# Altium PCB SFCMasterC.PcbDoc (part 1 of 2)
Units mm, origin at the board's own origin, x right, y up, seen from the top; angles counter-clockwise.
Board outline 152.4 x 101.6 mm, 2 copper layers (Top Layer, Bottom Layer); 178 components, 163 nets, 627 pads, 271 vias.
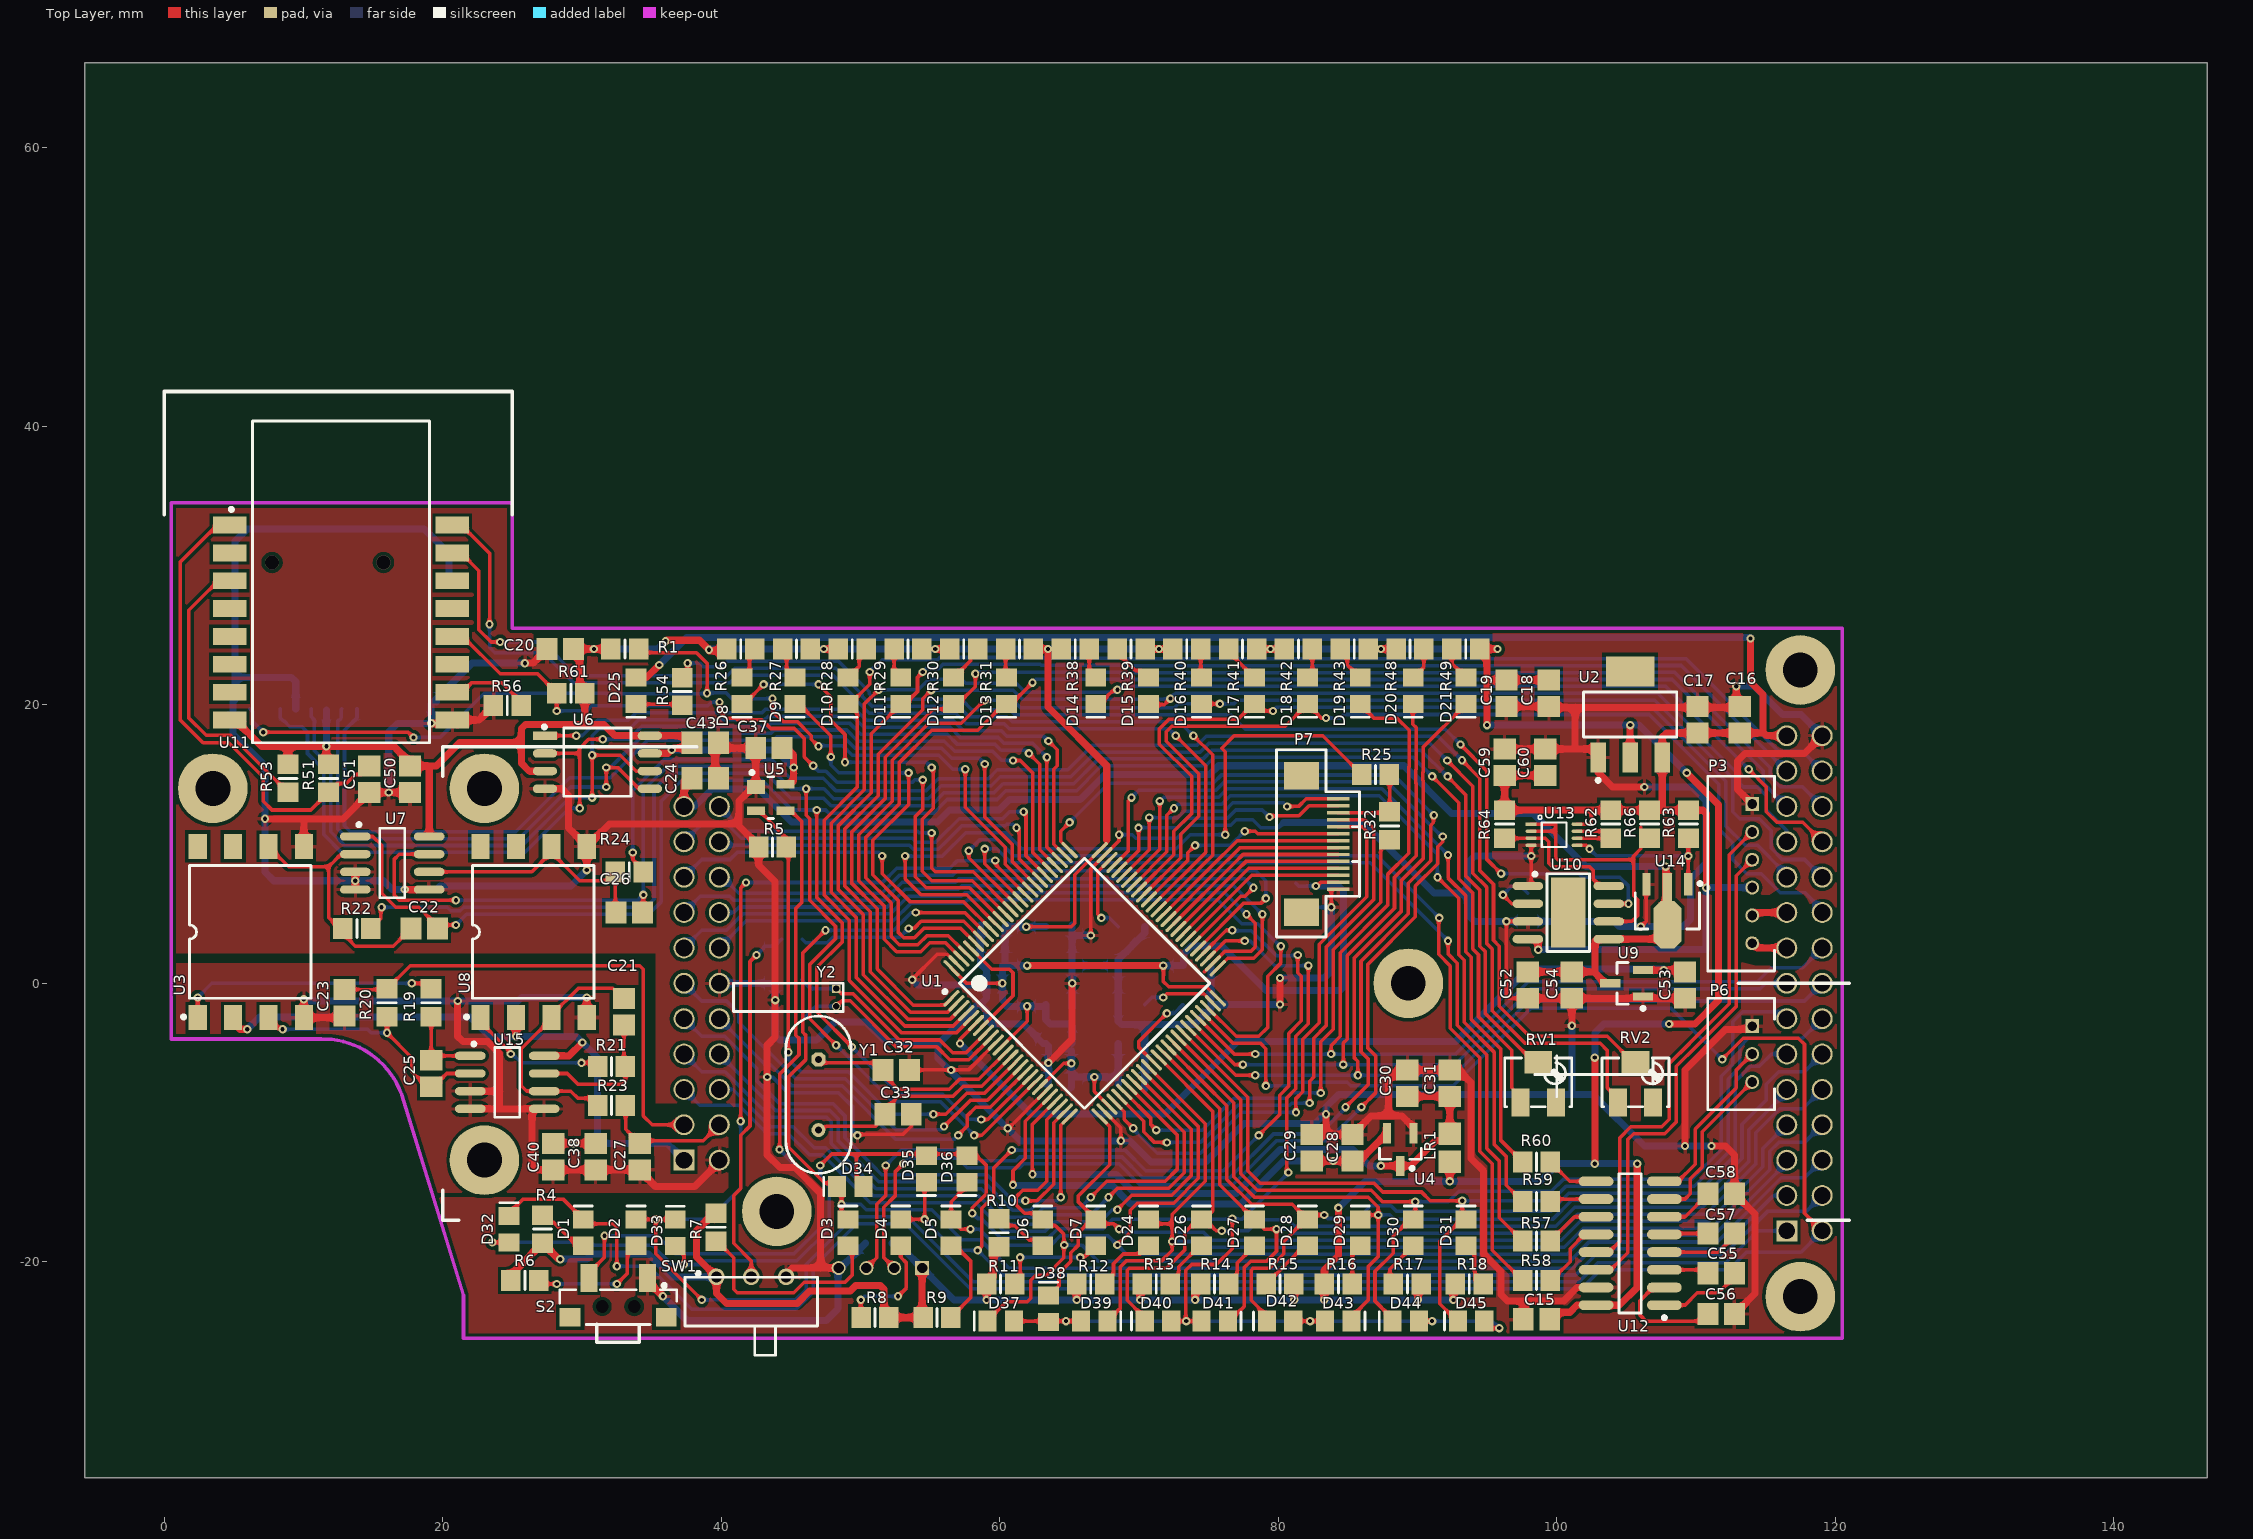
[diagram p0: Top Layer view]
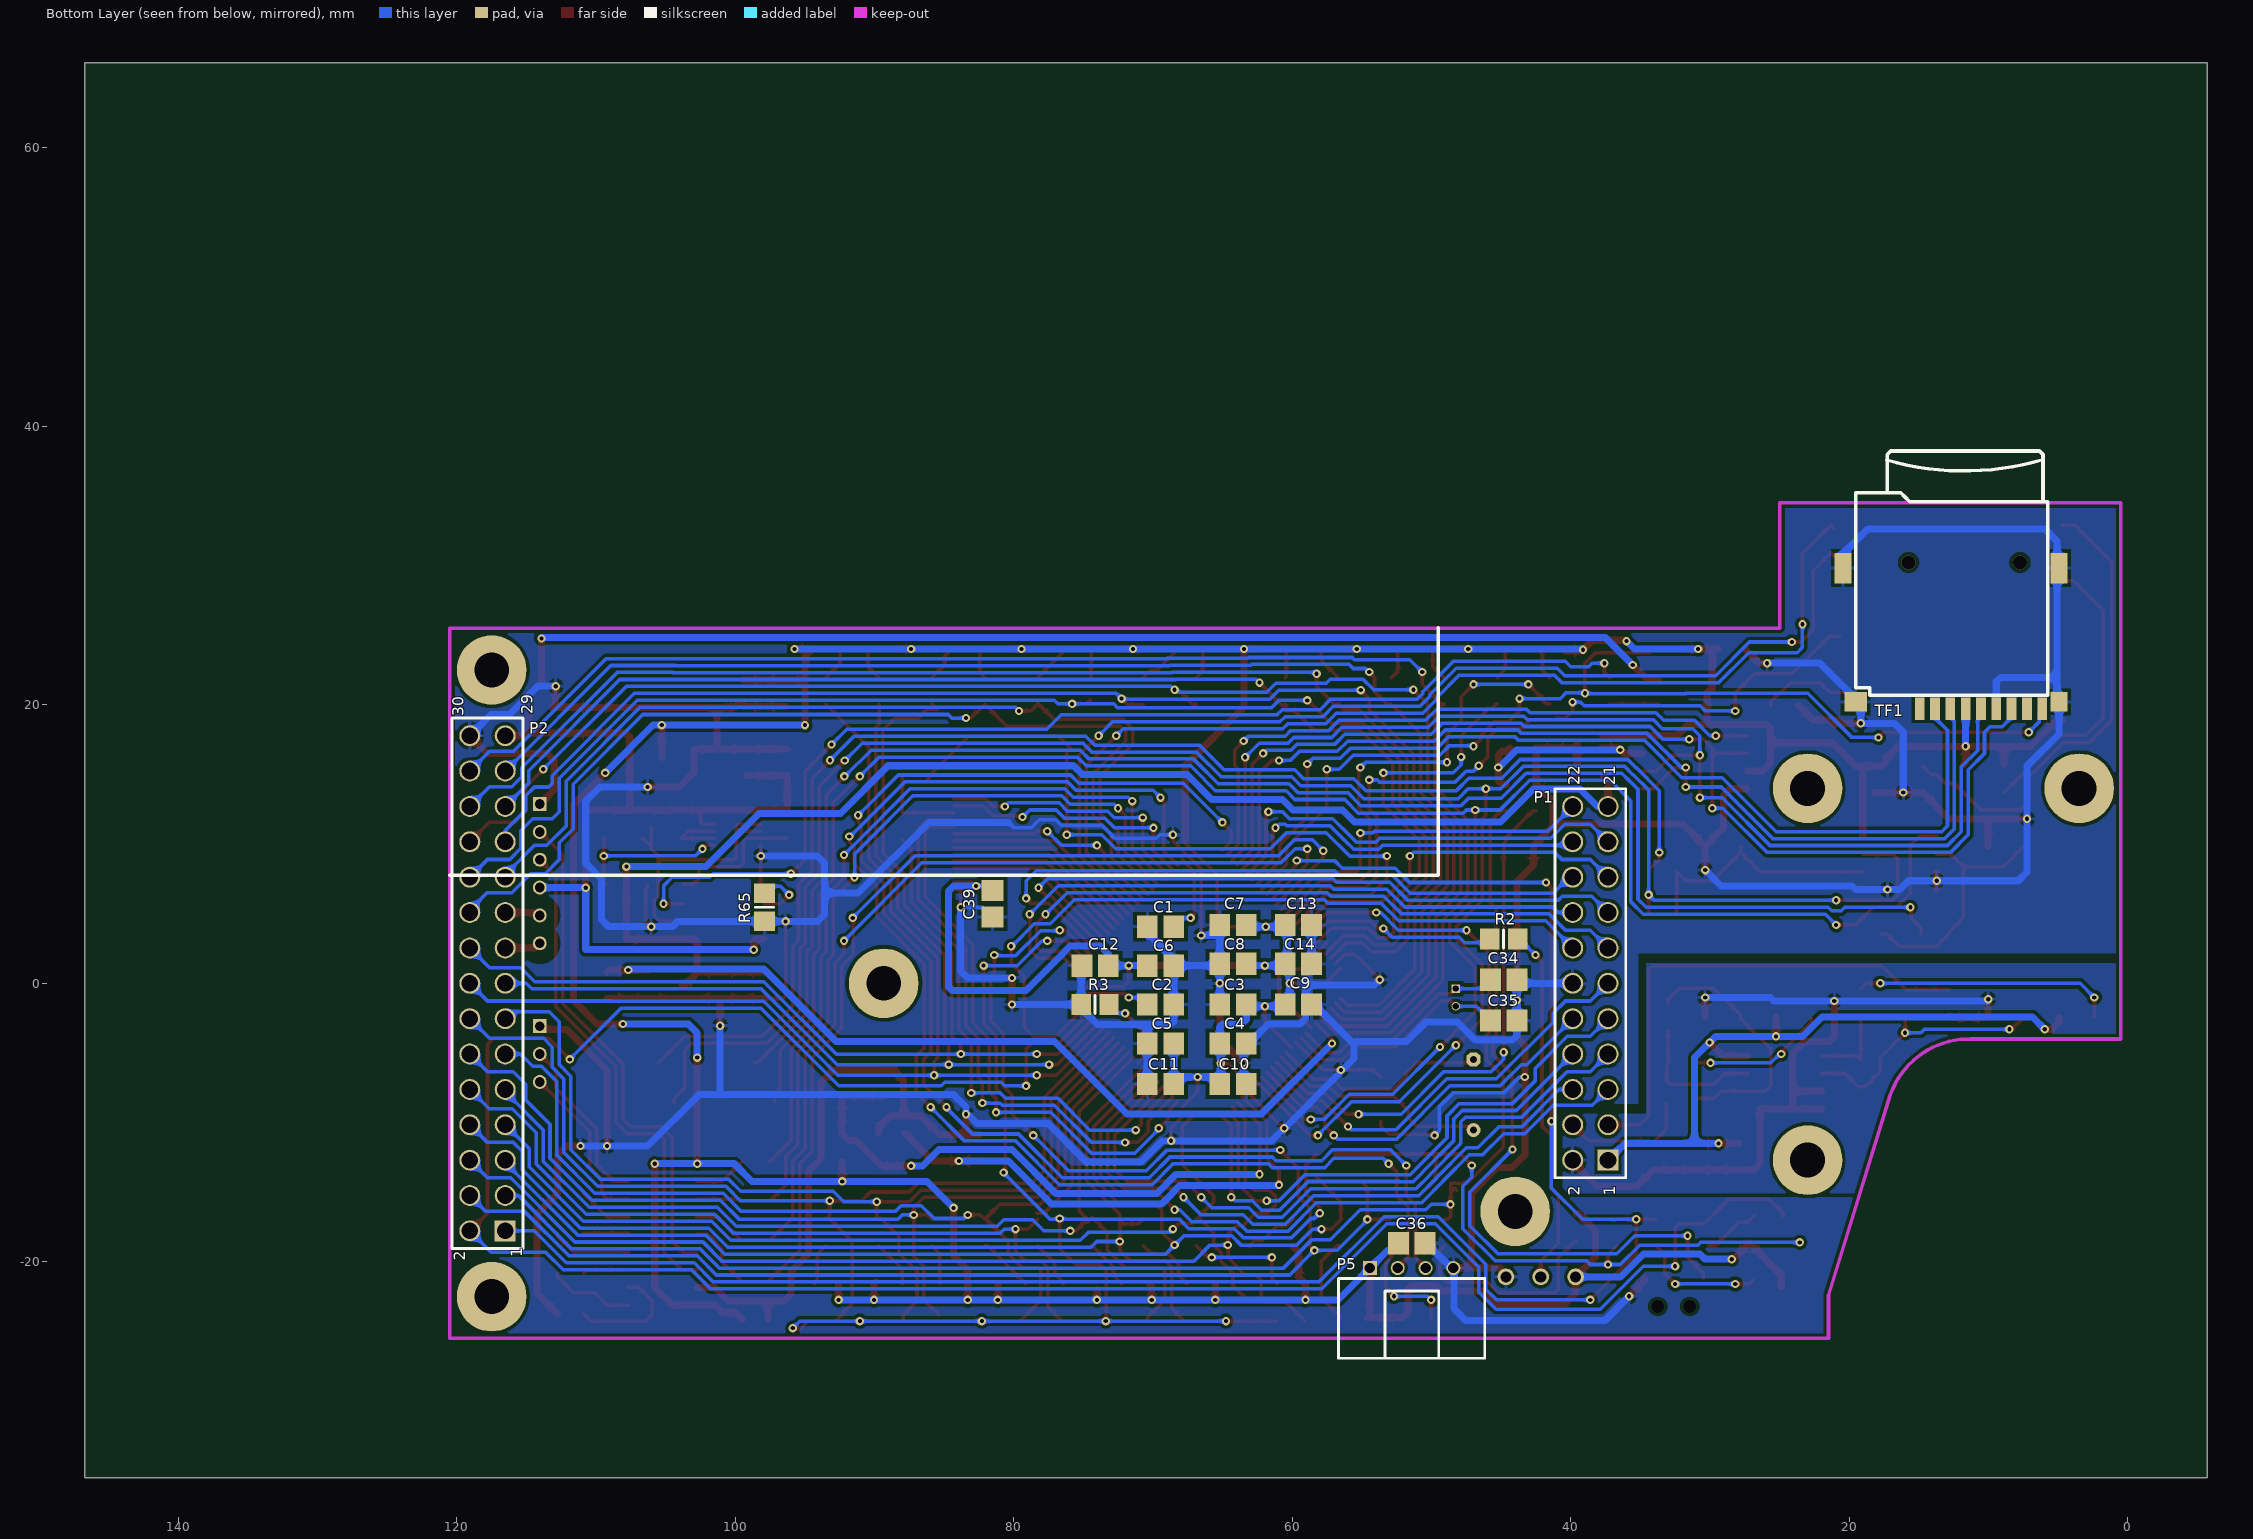
[diagram p1: Bottom Layer view, seen from below]

## Layer stack, top to bottom
Top Solder: solder mask 0.0102, Solder Resist, Dk 3.5
Top Layer: signal copper 0.0356
Dielectric 1: dielectric 0.32, FR-4, Dk 4.8
Bottom Layer: signal copper 0.0356
Bottom Solder: solder mask 0.0102, Solder Resist, Dk 3.5

## Board outline
-5.689,-35.504 146.711,-35.504 146.711,66.096 -5.689,66.096

## Design rules (kind name [scope] priority, off if disabled: settings)
Clearance Clearance_Poly-24VandGNDA [(InNamedPolygon('Bottom Layer-GND') OR InNamedPolygon('Top Layer-GND')) vs (InNet('24V') OR InNet('24VGNDA'))] p1: gap=1
Clearance Clearance_USB1 [InComponent('USB1') vs InNet('GND')] p2: gap=0.2
Clearance Clearance_U8 [InComponent('U8')] p3: gap=0.25
Clearance Clearance_U1 [InComponent('U1')] p4: gap=0.2
Clearance [All] p5: gap=0.245
ComponentClearance [All] p1: gap=0 collisioncheckmode=3 verticalgap=2540 showdistances=FALSE
PolygonConnect [All] p1: connectstyle=Relief reliefconductorwidth=0.254 reliefentries=4 polygonreliefangle="90 Angle" airgapwidth=0.254
RoutingVias [All] p1: holewidth=0.3 width=0.6 viastyle="Through Hole" minholewidth=0.3 minwidth=0.6 maxholewidth=0.3 maxwidth=0.6
SilkToSilkClearance [All] p1 off: silktosilkclearance=0
SilkToSolderMaskClearance [IsPad] p1 off: minsilkscreentomaskgap=0.254 clearancetoexposedcopper=TRUE
SolderMaskExpansion [All] p1: expansion=0.102
Width Width_PWR [InNet('9V') or InNet('3.3V') or InNet('5V') or InNet('5VA') or InNet('GND') or InNet('VBAT') or InNet('VBAT_SRC') or InNet('VDDA') or InNet('VREF') or InNet('VSSA') or InNet('24V')or InNet('GNDA') or InNet('GNDA1')or InNet('24VGNDA')] p1: maxlimit=0.508 minlimit=0.254 preferedwidth=0.508
Width Width_U1 [WithinRoom('RoomDefinitionU1')] p2: maxlimit=0.254 minlimit=0.25 preferedwidth=0.25
Width [All] p3: maxlimit=0.254 minlimit=0.254 preferedwidth=0.254
27 further rules are at their usual default settings.

## Classes and differential pairs
component class cpuadcinput: C21 C22 C23 C25 C26 C27 C38 C40 R19 R20 R21 R22 R23 R24 RV1 RV2 U3 U7 U8 U15
component class cpuledout: D8 D9 D10 D11 D12 D13 D14 D15 D16 D17 D18 D19 D20 D21 R26 R27 R28 R29 R30 R31 R38 R39 R40 R41 R42 R43 R48 R49
component class cpuledin: D1 D2 D3 D4 D5 D6 D7 D24 D26 D27 D28 D29 D30 D31 D32 D33 D34 D35 D36 D37 D38 D39 D40 D41 D42 D43 D44 D45 R4 R6 R7 R8 R9 R10 R11 R12 R13 R14 R15 R16 R17 R18
component class cpuinterface: C15 C16 C17 C18 C19 C20 C24 C28 C29 C30 C31 C32 C33 C34 C35 C36 C37 C39 C41 C43 C50 C51 C55 C56 C57 C58 LR1 P1 P2 P3 P5 P6 P7 R1 R2 R3 R5 R25 R32 R51 R53 R56 R57 R58 R59 R60 R61 S2 SW1 TF1 U2 U4 U5 U6 U11 U12 Y1 Y2
component class cpucore: C1 C2 C3 C4 C5 C6 C7 C8 C9 C10 C11 C12 C13 C14 U1
component class cpupwrbackup: C52 C53 C54 C59 C60 D25 R54 R62 R63 R64 R65 R66 U9 U10 U13 U14

## Components (designator, comment, footprint, x,y, rotation, side; value= is the part's Value field where it differs from the comment)
C1 "2.2uF" CAPC2012M 69.469,4.064 r0 bottom
C2 "2.2uF" CAPC2012M 69.469,-1.524 r180 bottom
C3 "0.01uF" CAPC2012M 64.262,-1.524 r180 bottom
C4 "0.01uF" CAPC2012M 64.262,-4.318 r0 bottom
C5 "0.01uF" CAPC2012M 69.469,-4.318 r180 bottom
C6 "0.01uF" CAPC2012M 69.469,1.27 r0 bottom
C7 "0.01uF" CAPC2012M 64.262,4.191 r180 bottom
C8 "0.01uF" CAPC2012M 64.262,1.397 r180 bottom
C9 "0.1uF" CAPC2012M 59.563,-1.524 r0 bottom
C10 "0.1uF" CAPC2012M 64.262,-7.239 r0 bottom
C11 "0.1uF" CAPC2012M 69.469,-7.239 r180 bottom
C12 "0.1uF" CAPC2012M 74.168,1.27 r180 bottom
C13 "0.1uF" CAPC2012M 59.563,4.191 r0 bottom
C14 "0.1uF" CAPC2012M 59.563,1.397 r0 bottom
C15 "0.1uF" CAPC2012M 98.552,-24.13 r0 top
C16 "10uF" CAPC2012M 113.157,18.923 r270 top
C17 "0.1uF" CAPC2012M 110.109,18.923 r270 top
C18 "10uF" CAPC2012M 99.441,20.828 r90 top
C19 "0.1uF" CAPC2012M 96.393,20.828 r90 top
C20 "0.1uF" CAPC2012M 28.448,24.003 r180 top
C21 "1nF" CAPC2012M 33.02,-2.032 r270 top
C22 "1nF" CAPC2012M 18.669,3.937 r0 top
C23 "470pF" CAPC2012M 12.954,-1.397 r90 top
C24 "0.1uF" CAPC2012M 38.862,14.732 r0 top
C25 "1nF" CAPC2012M 19.177,-6.477 r90 top
C26 "1nF" CAPC2012M 33.401,5.08 r0 top
C27 "470pF" CAPC2012M 34.163,-12.446 r90 top
C28 "0.1uF" CAPC2012M 85.344,-11.811 r270 top
C29 "1uF" CAPC2012M 82.423,-11.811 r270 top
C30 "0.1uF" CAPC2012M 89.281,-7.173 r270 top
C31 "1uF" CAPC2012M 92.329,-7.173 r270 top
C32 "20pF" CAPC2012M 52.578,-6.223 r0 top
C33 "20pF" CAPC2012M 52.705,-9.398 r0 top
C34 "15pF" CAPC2012M 44.831,0.254 r180 bottom
C35 "15pF" CAPC2012M 44.831,-2.667 r180 bottom
C36 "0.1uF" CAPC2012M 51.435,-18.669 r0 bottom
C37 "0.1uF" CAPC2012M 43.434,16.891 r0 top
C38 "0.01uF" CAPC2012M 30.988,-12.446 r90 top
C39 "0.1uF" CAPC2012M 81.534,5.715 r90 bottom
C40 "0.1uF" CAPC2012M 27.94,-12.446 r90 top
C43 "0.1uF" CAPC2012M 38.862,17.272 r0 top
C50 "0.1uF" CAPC2012M 17.653,14.655 r270 top
C51 "0.1uF" CAPC2012M 14.732,14.655 r270 top
C52 "0.1uF" CAPC2012M 97.917,-0.127 r270 top
C53 "0.1uF" CAPC2012M 109.22,-0.127 r270 top
C54 "10uF" CAPC2012M 101.092,-0.127 r270 top
C55 "0.1uF" CAPC2012M 111.826,-20.828 r180 top
C56 "0.1uF" CAPC2012M 111.826,-23.749 r180 top
C57 "0.1uF" CAPC2012M 111.826,-17.968 r0 top
C58 "0.1uF" CAPC2012M 111.826,-15.113 r0 top
C59 "0.1uF" CAPC2012M 96.266,15.875 r90 top
C60 "10uF" CAPC2012M 99.187,15.875 r90 top
D1 "Green" CD2012-0805 30.1,-17.9 r90 top locked
D2 "Green" CD2012-0805 33.9,-17.9 r90 top locked
D3 "Green" CD2012-0805 49.1,-17.9 r90 top locked
D4 "Green" CD2012-0805 52.9,-17.9 r90 top locked
D5 "Green" CD2012-0805 56.5,-17.9 r90 top locked
D6 "Green" CD2012-0805 63.1,-17.9 r90 top locked
D7 "Green" CD2012-0805 66.9,-17.9 r90 top locked
D8 "Green" CD2012-0805 41.5,21 r270 top locked
D9 "Green" CD2012-0805 45.3,21 r270 top locked
D10 "Green" CD2012-0805 49.1,21 r270 top locked
D11 "Green" CD2012-0805 52.9,21 r270 top locked
D12 "Green" CD2012-0805 56.7,21 r270 top locked
D13 "Green" CD2012-0805 60.5,21 r270 top locked
D14 "Green" CD2012-0805 66.9,21 r270 top locked
D15 "Green" CD2012-0805 70.7,21 r270 top locked
D16 "Green" CD2012-0805 74.5,21 r270 top locked
D17 "Green" CD2012-0805 78.3,21 r270 top locked
D18 "Green" CD2012-0805 82.1,21 r270 top locked
D19 "Green" CD2012-0805 85.9,21 r270 top locked
D20 "Green" CD2012-0805 89.7,21 r270 top locked
D21 "Green" CD2012-0805 93.5,21 r270 top locked
D24 "Green" CD2012-0805 70.7,-17.9 r90 top locked
D25 "Green" CD2012-0805 33.9,21 r270 top
D26 "Green" CD2012-0805 74.5,-17.9 r90 top locked
D27 "Green" CD2012-0805 78.3,-17.9 r90 top locked
D28 "Green" CD2012-0805 82.1,-17.9 r90 top locked
D29 "Green" CD2012-0805 85.9,-17.9 r90 top locked
D30 "Green" CD2012-0805 89.7,-17.9 r90 top locked
D31 "Green" CD2012-0805 93.5,-17.9 r90 top locked
D32 "LL4148" CD2012-0805 24.765,-17.653 r90 top
D33 "LL4148" CD2012-0805 36.703,-17.907 r90 top
D34 "LL4148" CD2012-0805 49.276,-14.605 r180 top
D35 "LL4148" CD2012-0805 54.737,-13.335 r270 top
D36 "LL4148" CD2012-0805 57.658,-13.335 r270 top
D37 "LL4148" CD2012-0805 60.071,-24.257 r180 top
D38 "LL4148" CD2012-0805 63.5,-23.368 r90 top
D39 "LL4148" CD2012-0805 66.802,-24.257 r0 top
D40 "LL4148" CD2012-0805 71.374,-24.257 r180 top
D41 "LL4148" CD2012-0805 75.438,-24.257 r0 top
D42 "LL4148" CD2012-0805 80.137,-24.257 r180 top
D43 "LL4148" CD2012-0805 84.328,-24.257 r0 top
D44 "LL4148" CD2012-0805 89.154,-24.257 r180 top
D45 "LL4148" CD2012-0805 93.853,-24.257 r180 top
LR1 "CBW201209U102T" INDC2012M 92.329,-11.811 r90 top
P1 "Header 11X2" HDR2X11 38.6,0 r90 bottom locked
P2 "Header 15X2" HDR2X15 117.8,0 r90 bottom locked
P3 "Header 6" HDR1x6-2.0 114.046,7.874 r270 top locked
P5 "Header 4H" HDR1X4H-2.0 51.435,-20.447 r180 bottom locked
P6 "Header 3" HDR1x3-2.0 114.046,-5.08 r270 top locked
P7 "Header 14" FPC0.5-14P-A 83,10 r90 top locked
R1 "100K" RESC2012M 33.091,24.003 r180 top
R2 "10K" RESC2012M 44.831,3.175 r180 bottom
R3 "10K" RESC2012M 74.168,-1.524 r0 bottom
R4 "1K" RESC2012M 27.178,-17.653 r270 top
R5 "100K" RESC2012M 43.688,9.779 r180 top
R6 "1K" RESC2012M 25.908,-21.336 r180 top
R7 "1K" RESC2012M 39.624,-17.526 r90 top
R8 "1K" RESC2012M 51.054,-24.003 r0 top
R9 "1K" RESC2012M 55.499,-24.003 r180 top
R10 "1K" RESC2012M 59.944,-17.907 r270 top
R11 "1K" RESC2012M 60.071,-21.59 r180 top
R12 "1K" RESC2012M 66.548,-21.59 r180 top
R13 "1K" RESC2012M 71.247,-21.59 r180 top
R14 "1K" RESC2012M 75.438,-21.59 r180 top
R15 "1K" RESC2012M 80.137,-21.59 r0 top
R16 "1K" RESC2012M 84.328,-21.59 r180 top
R17 "1K" RESC2012M 89.281,-21.59 r0 top
R18 "1K" RESC2012M 93.726,-21.59 r180 top
R19 "200R" RESC2012M 19.177,-1.397 r90 top
R20 "30K" RESC2012M 16.002,-1.397 r90 top
R21 "200R" RESC2012M 32.131,-5.969 r180 top
R22 "20K" RESC2012M 13.843,3.937 r180 top
R23 "30K" RESC2012M 32.131,-8.763 r0 top
R24 "20K" RESC2012M 33.401,8.001 r180 top
R25 "0R" RESC2012M 86.995,14.986 r0 top
R26 "1K" RESC2012M 41.402,24.003 r0 top
R27 "1K" RESC2012M 45.407,24.003 r180 top
R28 "1K" RESC2012M 49.413,24.003 r0 top
R29 "1K" RESC2012M 53.418,24.003 r180 top
R30 "1K" RESC2012M 57.424,24.003 r0 top
R31 "1K" RESC2012M 61.429,24.003 r180 top
R32 "0R" RESC2012M 88.011,11.303 r90 top
R38 "1K" RESC2012M 65.434,24.003 r0 top
R39 "1K" RESC2012M 69.44,24.003 r180 top
R40 "1K" RESC2012M 73.445,24.003 r0 top
R41 "1K" RESC2012M 77.45,24.003 r180 top
R42 "1K" RESC2012M 81.456,24.003 r0 top
R43 "1K" RESC2012M 85.461,24.003 r180 top
R48 "1K" RESC2012M 89.467,24.003 r0 top
R49 "1K" RESC2012M 93.472,24.003 r180 top
R51 "10K" RESC2012M 11.811,14.716 r270 top
R53 "100R" RESC2012M 8.89,14.716 r270 top
R54 "1K" RESC2012M 37.211,20.955 r90 top
R56 "1K" RESC2012M 24.638,19.939 r0 top
R57 "300R" RESC2012M 98.552,-18.5 r0 top
R58 "300R" RESC2012M 98.552,-21.336 r0 top
R59 "300R" RESC2012M 98.552,-15.663 r0 top
R60 "300R" RESC2012M 98.552,-12.827 r180 top
R61 "100K" RESC2012M 29.21,20.828 r180 top
R62 "10K" RESC2012M 103.886,11.43 r270 top
R63 "100K" RESC2012M 109.474,11.43 r90 top
R64 "100K" RESC2012M 96.266,11.43 r90 top
R65 "3K" RESC2012M 97.917,5.461 r90 bottom
R66 "100K" RESC2012M 106.68,11.43 r90 top
RV1 "10K" 3224W 98.679,-7.112 r270 top locked
RV2 "10K" 3224W 105.664,-7.112 r270 top locked
S2 "SW-PB" PBSMT-6X3X3.5R 32.607,-22.46 r180 top
SW1 "SW-SPDT" SW-9x3.5x3.5RS 42.164,-22.86 r0 top
TF1 "TF" TF-PUSH 12.7,24.765 r0 bottom locked
U1 "STM32F4x7VxT" LQFP100_L 66.106,0 r45 top locked
U2 "ASM1117-3.3" SOT-223 105.283,19.304 r0 top
U3 "HCNR201" SO8WL 6.223,3.683 r90 top
U4 "REF3030" SOT23_M 88.773,-11.938 r270 top
U5 "MIC811TU" SOT-143_N 43.561,13.335 r0 top
U6 "W25P64" SOIC8_W 31.115,15.875 r0 top locked
U7 "LM358" NSO8_N 16.383,8.636 r0 top
U8 "HCNR201" SO8WL 26.543,3.683 r90 top
U9 "XC6206P332MR" SOT-23_M 105.029,0 r180 top
U10 "TP4056" NSO8_TP4056 100.838,5.08 r0 top
U11 "ESP-12" ESP-12 12.7,25.908 r0 top locked
U12 "SP3232E" NSO16_M 105.283,-18.669 r180 top
U13 "SN74LVC2G00" PDSO-G8 99.822,10.668 r90 top
U14 "HT7036A-1" SOT89M 107.95,5.207 r270 top
U15 "LM358" NSO8_N 24.638,-7.112 r0 top
Y1 "8MHz@20pF" HC-49U 46.99,-8.001 r270 top
Y2 "32.768Hz@15pF" HC-RTC-L 48.26,-1.016 r180 top

## Footprints (in the part's own frame and the unit in brackets; to place one, negate y for a bottom-side part, rotate by r counter-clockwise, add the part's x,y. Pads: shape width x height; smd on the part's side, far side on the other; paste and mask are expansions set on the pad)
3224W [mm] "3224 - 4 mm SMD Trimming Potentiometer"
  rect 2x1.3 smd: 1(1.45,-1.27) 3(1.45,1.27)
  rect 1.6x2 smd: 2(-1.45,0)
  silkscreen extent -1.75,-2.4 1.75,2.4
CAPC2012M [mm] "Chip Capacitor, Body 2.0x1.3mm, IPC Low Density"
  rect 1.5x1.6 smd: 1(-0.95,0) 2(0.95,0)
  body extent -1.1,-0.72 1.1,0.72, height 1.1
CD2012-0805 [mm] "Chip Diode; Body 2.0 x 1.3 mm (LxW typ)"
  rect 1.3x1.5 smd: 1(-0.95,0) 2(0.95,0)
  silkscreen extent 1.9,-0.65 1.9,0.65
ESP-12 [mm] "SOIC, 16-Leads, Body 24x16mm, Pitch 2.0mm,"
  rect 2.4x1.2 smd: 1(-8,7) 2(-8,5) 3(-8,3) 4(-8,1) 5(-8,-1) 6(-8,-3) 7(-8,-5) 8(-8,-7) 9(8,-7) 10(8,-5) 11(8,-3) 12(8,-1) 13(8,1) 14(8,3) 15(8,5) 16(8,7)
  silkscreen extent -8,-8.64 6.35,14.48, body extent -6.35,-8.64 6.35,14.48, height 1.75
FPC0.5-14P-A [mm]
  rect 0.25x1.6 smd: 1(-3.25,-1.325) 2(-2.75,-1.325) 3(-2.25,-1.325) 4(-1.75,-1.325) 5(-1.25,-1.325) 6(-0.75,-1.325) 7(-0.25,-1.325) 8(0.25,-1.325) 9(0.75,-1.325) 10(1.25,-1.325) 11(1.75,-1.325) 12(2.25,-1.325) 13(2.75,-1.325) 14(3.25,-1.325)
  rect 2x2.5 smd: A(-4.9,1.325) B(4.9,1.325)
  silkscreen extent -6.68,-2.86 6.78,3.12
HC-49U [mm] "Quartz Crystal, Thru-Hole; 2 Leads; Body 11.35 x 4.65 x 13.46 mm (LxWxH max)"
  oct 1x1 hole 0.5: 1(-2.54,0)
  round 1 hole 0.5: 2(2.54,0)
  silkscreen extent -5.65,-2.35 5.65,2.35
HC-RTC-L [mm] "Crystal,, Radial, Tantalum; Body 3 x 8 mm (Dia.xH max); Pin Spacing 1.27 mm (typ)"
  rect 0.6x0.6 hole 0.45: 1(0,-0.635)
  round 0.6 hole 0.45: 2(0,0.635)
  silkscreen extent -0.51,-1.02 7.37,1.02
HDR1x3-2.0 [mm] "Connector; Header; 3 Position, pitch 2mm"
  rect 1x1 hole 0.7: 1(-2,0)
  round 1 hole 0.7: 2(0,0) 3(2,0)
  silkscreen extent -4,-3.2 4,1.6
HDR1X4H-2.0 [mm] "Connector; Header; 4 Position; Right Angle,Pitch 2.0mm"
  rect 1x1 hole 0.75: 1(-3,0)
  round 1 hole 0.75: 2(-1,0) 3(1,0) 4(3,0)
  silkscreen extent -5.25,-6.48 5.25,-0.76
HDR1x6-2.0 [mm] "Connector; Header; 6 Position, pitch 2mm"
  rect 1x1 hole 0.7: 1(-5,0)
  round 1 hole 0.7: 2(-3,0) 3(-1,0) 4(1,0) 5(3,0) 6(5,0)
  silkscreen extent -7,-3.2 7,1.6
HDR2X11 [mm] "Connector; Header; 11x2 Position;Pitch 2.54mm"
  rect 1.5x1.5 hole 1.2: 1(-12.7,-1.27)
  round 1.5 hole 1.2: 2(-12.7,1.27) 3(-10.16,-1.27) 4(-10.16,1.27) 5(-7.62,-1.27) 6(-7.62,1.27) 7(-5.08,-1.27) 8(-5.08,1.27) 9(-2.54,-1.27) 10(-2.54,1.27) 11(0,-1.27) 12(0,1.27) 13(2.54,-1.27) 14(2.54,1.27) 15(5.08,-1.27) 16(5.08,1.27) 17(7.62,-1.27) 18(7.62,1.27) 19(10.16,-1.27) 20(10.16,1.27) 21(12.7,-1.27) 22(12.7,1.27)
  silkscreen extent -13.97,-2.54 13.97,2.54
HDR2X15 [mm] "Connector; Header; 15x2 Position;Pitch 2.54mm"
  rect 1.5x1.5 hole 1.2: 1(-17.78,-1.27)
  round 1.5 hole 1.2: 2(-17.78,1.27) 3(-15.24,-1.27) 4(-15.24,1.27) 5(-12.7,-1.27) 6(-12.7,1.27) 7(-10.16,-1.27) 8(-10.16,1.27) 9(-7.62,-1.27) 10(-7.62,1.27) 11(-5.08,-1.27) 12(-5.08,1.27) 13(-2.54,-1.27) 14(-2.54,1.27) 15(0,-1.27) 16(0,1.27) 17(2.54,-1.27) 18(2.54,1.27) 19(5.08,-1.27) 20(5.08,1.27) 21(7.62,-1.27) 22(7.62,1.27) 23(10.16,-1.27) 24(10.16,1.27) 25(12.7,-1.27) 26(12.7,1.27) 27(15.24,-1.27) 28(15.24,1.27) 29(17.78,-1.27) 30(17.78,1.27)
  silkscreen extent -19.05,-2.54 19.05,2.54
INDC2012M [mm] "Chip Inductor, Body 2.0x1.2mm, IPC Low Density"
  rect 1.6x1.6 smd: 1(-1,0) 2(1,0)
  body extent -1.1,-0.7 1.1,0.7, height 1.1
LQFP100_L [mm] "Thin QFP, 100-Leads, Body 14x14mm, Pitch 0.5mm, IPC High Density"
  oval 1.55x0.25 smd: 1(-7.525,6) 2(-7.525,5.5) 3(-7.525,5) 4(-7.525,4.5) 5(-7.525,4) 6(-7.525,3.5) 7(-7.525,3) 8(-7.525,2.5) 9(-7.525,2) 10(-7.525,1.5) 11(-7.525,1) 12(-7.525,0.5) 13(-7.525,0) 14(-7.525,-0.5) 15(-7.525,-1) 16(-7.525,-1.5) 17(-7.525,-2) 18(-7.525,-2.5) 19(-7.525,-3) 20(-7.525,-3.5) 21(-7.525,-4) 22(-7.525,-4.5) 23(-7.525,-5) 24(-7.525,-5.5) 25(-7.525,-6) 51(7.525,-6) 52(7.525,-5.5) 53(7.525,-5) 54(7.525,-4.5) 55(7.525,-4) 56(7.525,-3.5) 57(7.525,-3) 58(7.525,-2.5) 59(7.525,-2) 60(7.525,-1.5) 61(7.525,-1) 62(7.525,-0.5) 63(7.525,0) 64(7.525,0.5) 65(7.525,1) 66(7.525,1.5) 67(7.525,2) 68(7.525,2.5) 69(7.525,3) 70(7.525,3.5) 71(7.525,4) 72(7.525,4.5) 73(7.525,5) 74(7.525,5.5) 75(7.525,6)
  oval 0.25x1.55 smd: 26(-6,-7.525) 27(-5.5,-7.525) 28(-5,-7.525) 29(-4.5,-7.525) 30(-4,-7.525) 31(-3.5,-7.525) 32(-3,-7.525) 33(-2.5,-7.525) 34(-2,-7.525) 35(-1.5,-7.525) 36(-1,-7.525) 37(-0.5,-7.525) 38(0,-7.525) 39(0.5,-7.525) 40(1,-7.525) 41(1.5,-7.525) 42(2,-7.525) 43(2.5,-7.525) 44(3,-7.525) 45(3.5,-7.525) 46(4,-7.525) 47(4.5,-7.525) 48(5,-7.525) 49(5.5,-7.525) 50(6,-7.525) 76(6,7.525) 77(5.5,7.525) 78(5,7.525) 79(4.5,7.525) 80(4,7.525) 81(3.5,7.525) 82(3,7.525) 83(2.5,7.525) 84(2,7.525) 85(1.5,7.525) 86(1,7.525) 87(0.5,7.525) 88(0,7.525) 89(-0.5,7.525) 90(-1,7.525) 91(-1.5,7.525) 92(-2,7.525) 93(-2.5,7.525) 94(-3,7.525) 95(-3.5,7.525) 96(-4,7.525) 97(-4.5,7.525) 98(-5,7.525) 99(-5.5,7.525) 100(-6,7.525)
  silkscreen extent -7.65,-6.35 6.35,6.8, body extent -7,-7 7,7, height 1.6
NSO8_N [mm] "SOIC-max660"
  oval 2.2x0.6 smd: 1(-2.654,1.905) 2(-2.654,0.635) 3(-2.654,-0.635) 4(-2.654,-1.905) 5(2.654,-1.905) 6(2.654,-0.635) 7(2.654,0.635) 8(2.654,1.905)
  silkscreen extent -2.52,-2.5 0.9,2.88, body extent -1.95,-2.45 1.95,2.45, height 1.75
NSO8_TP4056 [mm] "SOIC-max660"
  oval 2.2x0.6 smd: 1(-2.908,1.905) 2(-2.908,0.635) 3(-2.908,-0.635) 4(-2.908,-1.905) 5(2.908,-1.905) 6(2.908,-0.635) 7(2.908,0.635) 8(2.908,1.905)
  rect 2.5x5 smd: 9(0,0)
  silkscreen extent -2.52,-2.79 1.52,2.88
NSO16_M [mm] "SOIC, 16-Leads, Body 9.9x3.9mm, Pitch 1.27mm, IPC Low Density"
  oval 2.5x0.7 smd: 1(-2.45,4.445) 2(-2.45,3.175) 3(-2.45,1.905) 4(-2.45,0.635) 5(-2.45,-0.635) 6(-2.45,-1.905) 7(-2.45,-3.175) 8(-2.45,-4.445) 9(2.45,-4.445) 10(2.45,-3.175) 11(2.45,-1.905) 12(2.45,-0.635) 13(2.45,0.635) 14(2.45,1.905) 15(2.45,3.175) 16(2.45,4.445)
  silkscreen extent -2.58,-5 0.8,5.47, body extent -2,-5 2,5, height 1.75
PBSMT-6X3X3.5R [mm] "Button puts right,Body 6mm(L)x3mm(W)x3.5mm(H),ptich=4.2mm"
  rect 1.5x1.3 smd: 0(-3.45,1.524) 0(3.45,1.524)
  round 0 hole 0.9: 0(-1.15,0.75) 0(1.15,0.75)
  rect 1.2x2 smd: 1(-2.1,-1.3) 2(2.1,-1.3)
  silkscreen extent -4.2,-0.89 4.2,3.3
PDSO-G8 [mm] "U"
  rect 0.25x0.8 smd: 1(0.762,1.651)
  oval 0.25x0.8 smd: 2(0.254,1.651) 3(-0.254,1.651) 4(-0.762,1.651) 5(-0.762,-1.651) 6(-0.254,-1.651) 7(0.254,-1.651) 8(0.762,-1.651)
  silkscreen extent -0.89,-0.89 1.4,1.16
RESC2012M [mm] "Chip Resistor, Body 2.0x1.3mm, IPC Low Density"
  rect 1.4x1.5 smd: 1(-1,0) 2(1,0)
  silkscreen extent 0,-0.65 0,0.65, body extent -1.07,-0.7 1.07,0.7, height 0.65
SO8WL [mm] "SOIC 8 Leads; Body11mm(L)x12.3mm(W); Pitch 2.54 mm"
  rect 1.8x1.3 smd: 1(-6.15,3.81) 2(-6.15,1.27) 3(-6.15,-1.27) 4(-6.15,-3.81) 5(6.15,-3.81) 6(6.15,-1.27) 7(6.15,1.27) 8(6.15,3.81)
  silkscreen extent -6.22,-4.32 4.77,4.95
SOIC8_W [mm] "SPI_FLASH"
  rect 1.75x0.6 smd: 1(-3.768,1.905)
  oval 1.75x0.6 smd: 2(-3.768,0.635) 3(-3.768,-0.635) 4(-3.768,-1.905) 5(3.768,-1.905) 6(3.768,-0.635) 7(3.768,0.635) 8(3.768,1.905)
  silkscreen extent -3.93,-2.45 2.41,2.66, body extent -3.56,-2.45 3.56,2.45, height 1.75
SOT23_M [mm] "SOT23, 3-Leads, Body 2.9x1.3mm, Pitch 0.95mm, Lead Span 2.3mm - Reverse Pinning, IPC Low Density"
  rect 1.45x0.6 smd: 1(1.175,0) 2(-1.175,-0.95) 3(-1.175,0.95)
  silkscreen extent -0.1,-1.5 1.47,1.5, body extent -0.7,-1.5 0.7,1.5, height 1.1
SOT89M [mm] "SOT89, 3-Leads, Body 4.5x2.4 mm, Pitch 1.5mm, Lead Span 4.1mm, IPC Low Density"
  rect 1.6x0.6 smd: 1(-1.9,1.5) 3(-1.9,-1.5)
  rect 2x0.7 smd: 2(-1.7,0)
  oct 3.4x2 smd: 2(1,0)
  silkscreen extent -2.07,-2.3 1.3,2.48, body extent -1.3,-2.3 1.3,2.3, height 1.6
SOT-23_M [mm] "SOT23, 3-Leads, Body 2.9x1.3mm, Pitch 0.95mm, Lead Span 2.5mm, IPC Low Density"
  rect 1.45x0.6 smd: 1(-1.175,0.95) 2(-1.175,-0.95) 3(1.175,0)
  silkscreen extent -1.3,-1.5 0.7,1.92, body extent -0.7,-1.5 0.7,1.5, height 1.1
SOT-143_N [mm] "SOT143, 4-Leads, Body 2.9x1.3mm, Pitch 1.9mm, Lead Span 2.5mm, IPC Medium Density"
  rect 1.3x1 smd: 1(-1.05,0.75)
  rect 1.3x0.6 smd: 2(-1.05,-0.95) 3(1.05,-0.95) 4(1.05,0.95)
  silkscreen extent -1.47,-1.5 0.2,1.92, body extent -0.7,-1.52 0.7,1.52, height 1.1
SOT-223 [mm] "SOT-223/SC-73; 4 Leads; Body 6.7 x 7.3 mm, inc. leads (LxW max)"
  rect 1.1x2.15 smd: 1(-2.3,-3.1) 2(0,-3.1) 3(2.3,-3.1)
  rect 3.5x2.15 smd: 4(0,3.1)
  silkscreen extent -3.35,-4.85 3.35,1.63
SW-9x3.5x3.5RS [mm] "单排直插3脚2档侧拨微型滑动开关"
  round 1.2 hole 0.8: 1(-2.5,1.778) 2(0,1.778) 3(2.5,1.778)
  silkscreen extent -4.75,-3.85 4.75,2.16
TF-PUSH [mm] "Micro SD Card Push 1.9h Type"
  rect 0.7x1.6 smd: 1(2.25,5.05) 2(1.15,5.05) 3(0.05,5.05) 4(-1.05,5.05) 5(-2.15,5.05) 6(-3.25,5.05) 7(-4.35,5.05) 8(-5.45,5.05) 9(-6.55,5.05)
  rect 1.2x2.2 smd: 10(-7.75,-5.05) 10(7.75,-5.05)
  rect 1.2x1.4 smd: 10(-7.75,4.55)
  rect 1.6x1.4 smd: 10(6.85,4.55)
  silkscreen extent -6.94,-13.46 6.86,4.06

## Part data
C1 C2 C3 C4 C5 C6 C7 C8 C9 C10 C11 C12 C13 C14 C15 C16 C17 C18 C19 C20 C21 C22 C23 C24 C25 C26 C27 C28 C29 C30 C31 C32 C33 C34 C35 C36 C37 C38 C39 C40 C43 C50 C51 C52 C53 C54 C55 C56 C57 C58 C59 C60: library part Cap, "Capacitor"
D1 D2 D3 D4 D5 D6 D7 D8 D9 D10 D11 D12 D13 D14 D15 D16 D17 D18 D19 D20 D21 D24 D25 D26 D27 D28 D29 D30 D31: library part LED1, "Green LED,Output indicate."
D32 D33 D34 D35 D36 D37 D38 D39 D40 D41 D42 D43 D44 D45: library part "Diode 1N4007", "1 Amp General Purpose Rectifier"
LR1: library part BLM10/11/21/31/41, "EMI FILTERS,DC Resistance max.0.05~1.5 ohms,10 ~ 1000 ohms at 100MHz  Frequency"
P1: "Header, 11-Pin, Dual row"
P2: "Header, 15-Pin, Dual row"
P3: "Header, 6-Pin"
P5: "Header, 4-Pin, Right Angle"
P6: "Header, 3-Pin"
P7: "Header, 14-Pin"
R1 R2 R3 R4 R5 R6 R7 R8 R9 R10 R11 R12 R13 R14 R15 R16 R17 R18 R19 R20 R21 R22 R23 R24 R25 R26 R27 R28 R29 R30 R31 R32 R38 R39 R40 R41 R42 R43 R48 R49 R51 R53 R54 R56 R57 R58 R59 R60 R61 R62 R63 R64 R65 R66: library part Res1, "Resistor"
RV1 RV2: library part RPot-A, "Potentiometer"
S2: "Push Button ,2mm(L)x2mm(W)x10mm(H)"
SW1: library part SW-SPDT_1, "开关"
U1: "STM32 ARM-based 32-bit MCU with 64 Kbytes Flash, 100-pin LQFP, Industrial Temperature"
U2: library part LM1117T-5.0, "800mA Low-Dropout Linear Regulator"
U3 U8: library part HCNR200/201, "High-Linearity Analog  Optocouplers"
U4: library part REF3330, "1.25V 1.8V 2.048V 2.5V 3.0V 3.3V 4.096V reference voltage"
U5: library part MAX811-EUS-T, "4-Pin 礟 Voltage Monitors with Manual Reset Input"
U6: library part M25P32, "32 Mbit, Low Voltage, Serial Flash Memory  With 50MHz SPI Bus Interface"
U7 U15: "双运放"
U9: library part XC6206, "250mA Low ESR Dropout Linear Regulator"
U10: "锂电池充电管理"
U11: "SOC Wifi Mode"
U12: "+3.0V+5V Powered, Multi-Channel RS-232 Driver/Receiver"
U13: "Dual 2-input positive-NAND gate"
U14: library part HT70XX
Y1 Y2: library part XTAL, "Crystal Oscillator"

## Free pads (board coordinates)
  round 5 hole 2.5: 0(3.5,14) 0(23,-12.7) 0(23,14) 0(44,-16.38) 0(89.35,0) 0(117.5,-22.5) 0(117.5,22.5)

## Via types
v1: diameter 0.6, hole 0.3, Top Layer to Bottom Layer, 269 vias
v2: diameter 1, hole 1, Top Layer to Bottom Layer, 2 vias

## Nets (pads, with @x,y where several pads share a name; then routed paths per layer and width w, separated by ;. In a path a pad name is that pad's centre, name@x,y a point inside that pad or via, vN(x,y) a via of type N, cw(c..) or ccw(c..) an arc to the next point about the centre after c; other vN are vias at no path point)
3.3V: C3.2 C4.2 C5.2 C6.2 C7.2 C8.2 C9.2 C10.2 C11.2 C12.2 C13.2 C14.2 C15.2 C18.2 C19.2 C20.1 C36.2 C37.2 C39.2 C43.1 C50.1 LR1.1 P5.1 P7.2 R1.2 R4.2 R6.2 R7.2 R8.2 R9.2 R10.2 R11.2 R12.2 R13.2 R14.2 R15.2 R16.2 R17.2 R18.2 R26.1 R27.1 R28.1 R29.1 R30.1 R31.1 R38.1 R39.1 R40.1 R41.1 R42.1 R43.1 R48.1 R49.1 R51.1 R53.1 R61.1 SW1.1 TF1.4 U1.11 U1.19 U1.28 U1.50 U1.75 U1.100 U2.2 U5.4 U6.3 U6.7 U6.8 U7.8 U11.8 U12.16 | length 475.5
  Top Layer w0.254: U1.100@56.542,1.078 57.621,0 v1(60.198,0) ; U1.11@60.078,-4.614 61.937,-2.755 61.976,-2.716 v1(61.976,-1.651) ; v1(61.912,4.064) 65.151,4.064 65.405,4.318 65.405,7.784 U1.75@67.184,9.564 67.691,10.07 67.691,10.922 ; U1.19@62.906,-7.442 64.601,-5.748 v1(65.151,-5.748) ; v1(66.802,-6.731) 66.802,-7.767 U1.28@67.891,-8.857 ; v1(71.755,1.27) 71.755,0.127 72.136,-0.254 74.845,-0.254 U1.50@75.67,-1.078 ; v1(82.709,6.985) 82.804,6.985 83.069,7.25 P7.2@84.325,7.25
  Top Layer w0.508: U11.8@4.7,18.908 5.095,18.908 6.985,17.018 8.89,17.018 ; R53.1@8.89,15.716 8.89,17.018 ; R51.1@11.811,15.716 11.65,15.877 v1(11.65,17.018) ; U7.8@19.037,10.541 19.037,15.605 ; R6.2@24.892,-21.78 24.892,-20.939 R4.2@27.178,-18.653 28.337,-19.812 v1(28.448,-19.812) ; U6.3@27.347,15.24 26.213,15.24 25.654,15.799 25.654,17.272 ; C20.1@29.398,24.003 C20.1@29.845,24.003 ; R1.2@32.091,24.003 C20.1@29.845,24.003 ; U6.7@34.883,16.51 36.195,16.51 v1(36.449,16.764) 36.576,16.891 C43.1@37.785,16.891 ; v1(36.005,24.575) 36.068,24.638 38.446,24.638 v1(39.127,23.957) 39.127,23.887 39.116,23.876 R26.1@40.386,23.876 ; C43.1@37.719,17.78 U6.8@34.883,17.78 32.372,17.78 31.573,18.579 30.226,18.579 ; R7.2@39.624,-16.526 39.468,-16.526 38.227,-17.767 38.227,-19.645 SW1.1@39.664,-21.082 39.664,-22.265 40.386,-22.987 45.466,-22.987 46.355,-22.098 49.276,-22.098 49.657,-21.717 51.435,-21.717 51.689,-21.971 51.689,-23.638 R8.2@52.054,-24.003 54.626,-24.003 54.435,-23.812 P5.1@54.435,-20.447 ; C37.2@44.384,16.891 44.611,16.664 44.931,16.664 45.212,16.383 45.212,14.539 44.958,14.285 U5.4@44.611,14.285 ; v1(47.371,24.003) R28.1@48.514,24.003 ; v1(55.372,24.003) R30.1@56.424,24.003 ; v1(59.055,-22.733) 59.071,-22.717 R11.2@59.071,-21.59 59.563,-21.098 59.563,-19.304 59.944,-18.923 R10.2@59.944,-18.907 ; v1(61.976,1.27) v1(71.755,1.27) ; R31.1@62.429,24.003 v1(63.472,24.003) 63.472,19.84 67.691,15.621 67.691,10.287 ; v1(65.532,-22.733) 65.532,-21.606 R12.2@65.548,-21.59 ; v1(70.104,-22.733) 70.104,-21.733 R13.2@70.247,-21.59 ; R39.1@70.44,24.003 v1(71.442,24.003) R40.1@72.445,24.003 ; v1(74.041,-22.733) R14.2@74.041,-21.987 ; R41.1@78.45,24.003 v1(79.453,24.003) R42.1@80.456,24.003 ; v1(81.153,-22.733) R15.2@81.153,-21.606 ; v1(83.312,-22.733) 83.312,-21.606 R16.2@83.328,-21.59 83.328,-20.558 84.328,-19.558 v1(84.328,-16.129) ; v1(87.376,24.003) R48.1@88.467,24.003 ; R17.2@89.916,-21.447 90.043,-21.574 v1(90.043,-22.733) ; v1(92.329,-14.224) LR1.1@92.329,-12.811 ; v1(92.583,-22.733) R18.2@92.583,-21.606 ; v1(94.996,18.542) 94.996,21.844 ; v1(95.758,24.003) R49.1@94.472,24.003 94.996,23.479 94.996,21.844 ; C18.2@99.441,21.778 C19.2@96.393,21.778 95.062,21.778 94.996,21.844 ; C15.2@99.502,-24.13 100.01,-23.622 100.965,-23.622 101.473,-23.114 U12.16@102.833,-23.114 104.521,-23.114 105.791,-21.844 v1(105.791,-12.954) ; v1(102.743,-12.954) v1(102.743,-5.334) ; U2.2@105.283,16.204 v1(105.283,18.542) ; v1(108.077,-2.921) 109.934,-2.921 111.633,-1.222 111.633,12.827 v1(109.347,15.113) ; 8.89,17.018 v1(11.65,17.018) ; v1(11.65,17.018) 16.51,17.018 17.399,16.129 17.399,15.859 C50.1@17.653,15.605 19.542,15.605 21.209,17.272 25.654,17.272 ; 25.654,17.272 25.654,18.288 25.945,18.579 30.226,18.579 ; C20.1@29.845,24.003 29.845,21.193 R61.1@30.21,20.828 30.21,18.595 30.226,18.579
  Bottom Layer w0.254: C3.2@63.185,-1.651 C3.2@63.312,-1.524 ; C4.2@64.704,-4.826 C4.2@65.151,-4.826 ; C10.2@64.928,-7.716 C10.2@65.151,-7.493 ; C5.2@68.486,-4.539 C5.2@68.486,-4.285 ; C39.2@81.28,7.173 81.468,6.985 v1(82.709,6.985)
  Bottom Layer w0.508: v1(11.65,17.018) TF1.4@11.65,19.631 ; v1(28.448,-19.812) 30.353,-19.812 30.734,-19.431 34.794,-19.431 36.445,-21.082 SW1.1@39.664,-21.082 ; v1(30.861,24.003) 35.433,24.003 v1(36.005,24.575) ; v1(36.449,16.764) 43.897,16.764 v1@45.19,15.472 ; v1@39.116,24.003 v1(47.371,24.003) v1(55.372,24.003) 55.391,24.022 63.453,24.022 v1(63.472,24.003) v1(63.472,24.003) 71.441,24.004 v1(71.442,24.003) v1(79.453,24.003) v1(87.376,24.003) v1(95.758,24.003) ; C36.2@52.258,-18.669 52.766,-19.177 53.165,-19.177 56.721,-22.733 v1(59.055,-22.733) v1(65.532,-22.733) v1(70.104,-22.733) v1(74.041,-22.733) v1(81.153,-22.733) v1(83.312,-22.733) v1(90.043,-22.733) v1(92.583,-22.733) ; C14.2@60.386,1.397 C13.2@60.386,4.064 ; C9.2@60.513,-1.651 C3.2@63.185,-1.651 ; C9.2@60.513,-1.524 60.198,-1.209 60.198,1.27 v1(61.976,1.27) 62.55,1.27 ; C13.2@60.513,4.191 C13.2@60.386,4.064 ; C3.2@63.312,-1.524 63.312,-2.606 63.627,-2.921 65.024,-2.921 65.212,-3.109 C4.2@65.212,-4.318 ; C7.2@63.312,4.064 v1(61.912,4.064) C13.2@60.386,4.064 ; C10.2@65.151,-7.493 v1(65.151,-5.748) C4.2@65.151,-4.826 ; C10.2@65.151,-6.731 68.453,-6.731 68.519,-6.797 C11.2@68.519,-7.239 C5.2@68.519,-4.318 ; C6.2@70.419,1.27 71.374,1.27 C12.2@73.218,1.27 73.218,2.098 73.787,2.667 75.977,2.667 76.367,2.277 76.367,2.246 79.121,-0.508 84.428,-0.508 84.709,-0.227 84.709,6.604 84.328,6.985 v1(82.709,6.985) ; v1(84.328,-16.129) 86.233,-14.224 98.806,-14.224 100.076,-12.954 v1(105.791,-12.954) ; v1(94.996,18.542) v1(105.283,18.542) 105.918,18.542 v1(109.347,15.113) ; v1(102.743,-5.334) 102.743,-3.556 103.378,-2.921 v1(108.077,-2.921)
  other v1: 45.212,15.494
5V: C16.2 C17.2 C59.1 C60.1 D25.1 P2.29 P3.4 R62.1 R63.2 R64.2 R66.2 U2.3 U10.4 U13.8 | length 151.9
  Top Layer w0.254: U13.8@101.473,11.43 102.489,11.43 102.489,12.573
  Top Layer w0.508: D25.1@33.667,21.717 D25.1@33.9,21.95 34.65,21.95 v1(35.56,22.86) ; U10.4@97.93,3.175 98.552,3.175 98.679,3.048 v1(98.679,2.413) ; C60.1@99.187,14.925 C59.1@96.266,14.925 R64.2@96.266,12.43 R62.1@103.886,12.43 R66.2@106.68,12.43 107.696,12.43 ; v1(110.744,6.858) 110.76,6.874 110.76,12.176 110.506,12.43 R63.2@109.474,12.43 107.696,12.43 ; v1(113.919,24.765) 113.919,21.628 114.808,20.739 114.808,18.034 115.062,17.78 P2.29@116.53,17.78 ; 114.808,17.973 C16.2@113.157,17.973 C17.2@110.109,17.973 107.889,17.973 107.583,17.667 U2.3@107.583,16.204 107.583,12.543 107.696,12.43
  Bottom Layer w0.508: v1(35.56,22.86) 37.528,24.828 v1@113.919,24.828 ; v1(98.679,2.413) 110.744,2.413 110.744,6.874 P3.4@114.046,6.874
5VA: C38.2 C40.2 P1.1 U3.2 U8.2 U15.8 | length 52.2
  Top Layer w0.508: U3.2@4.953,-2.467 4.953,-2.794 5.461,-3.302 v1(5.969,-3.302) ; v1(25.273,-3.81) U8.2@25.273,-2.413 ; U15.8@27.292,-5.207 29.083,-5.207 v1(30.035,-4.255) ; C40.2@27.94,-11.496 C38.2@30.988,-11.496
  Bottom Layer w0.508: v1(5.969,-3.302) 6.858,-2.413 21.971,-2.413 23.368,-3.81 v1(25.273,-3.81) 29.591,-3.81 31.115,-5.334 31.115,-11.493 v1(29.4,-11.493) 36.123,-11.493 P1.1@37.33,-12.7
24V: P2.19 P3.5 | length 2.6
  Top Layer w0.508: P3.5@114.046,4.874 114.252,5.08 P2.19@116.53,5.08
24VGNDA: P2.17 P3.6 | length 2.6
  Top Layer w0.508: P3.6@114.046,2.874 114.38,2.54 P2.17@116.53,2.54
ADC12_PORT: C23.2 P1.3 R20.2 | length 36.1
  Top Layer w0.254: C23.2@12.827,-0.447 15.952,-0.447 R20.2@16.002,-0.397 17.669,1.27 34.163,1.27 34.417,1.016 34.417,-9.525 35.052,-10.16 P1.3@37.33,-10.16
ADC13_PORT: C27.2 P1.4 R23.2 | length 9.5
  Top Layer w0.254: R23.2@33.147,-8.636 33.147,-10.48 C27.2@34.163,-11.496 34.356,-11.303 38.727,-11.303 P1.4@39.87,-10.16
ADC_IN12: C22.2 RV1.1 U1.17 U7.1 | length 155.4
  Top Layer w0.254: U7.1@13.729,10.541 14.986,10.541 15.621,9.906 15.621,6.477 16.637,5.461 18.288,5.461 19.558,4.191 v1(20.955,4.191) ; v1@46.854,12.446 46.854,6.174 48.713,4.315 48.713,2.993 46.863,1.143 46.863,-2.032 v1(49.403,-4.572) ; v1(58.674,-9.779) 59.155,-9.779 U1.17@62.199,-6.735 ; v1(91.059,14.859) 92.964,12.954 92.964,7.507 93.962,6.509 93.962,6.495 93.97,6.487 93.97,2.465 94.388,2.047 94.388,-2.411 96.774,-4.797 96.774,-7.493 97.155,-7.874 RV1.1@97.155,-8.509
  Bottom Layer w0.254: v1(20.955,4.191) 21.717,4.953 34.798,4.953 35.687,5.842 35.687,13.081 37.181,14.575 42.96,14.575 45.089,12.446 47.498,12.446 47.724,12.22 55.264,12.22 56.242,13.198 59.817,13.198 60.452,13.833 65.526,13.833 67.125,15.432 67.128,15.432 67.307,15.611 74.812,15.611 75.448,16.247 89.671,16.247 v1(91.059,14.859) ; v1(49.403,-4.572) 52.801,-7.97 55.92,-7.97 57.729,-9.779 v1(58.674,-9.779)
  other v1: 46.863,12.446
ADC_IN13: C26.2 RV2.1 U1.18 U7.7 | length 165.8
  Top Layer w0.254: U7.7@19.037,9.271 16.891,9.271 16.51,8.89 16.51,6.35 16.891,5.969 v1(20.955,5.969) ; C26.2@34.351,5.08 34.417,5.146 v1(34.417,6.35) ; v1(46.101,13.97) 46.101,12.065 46.355,11.811 46.355,5.968 48.214,4.109 48.214,3.2 46.364,1.35 46.364,-2.549 v1@48.133,-4.318 ; v1(58.166,-10.922) 58.72,-10.922 U1.18@62.553,-7.089 ; v1(92.141,16.002) 93.98,14.163 93.98,7.903 94.96,6.923 94.96,6.908 94.968,6.9 94.968,2.878 95.386,2.46 95.386,-1.97 97.729,-4.313 103.119,-4.313 103.632,-4.826 103.632,-7.493 104.394,-8.255 RV2.1@104.394,-8.562
  Bottom Layer w0.254: v1(20.955,5.969) 34.036,5.969 v1(34.417,6.35) 34.417,13.883 35.52,14.986 35.546,14.986 36.133,15.573 43.426,15.573 45.029,13.97 47.385,13.97 48.091,13.264 54.871,13.264 55.803,14.196 59.403,14.196 60.039,14.832 60.474,14.832 60.475,14.831 65.112,14.831 66.711,16.43 66.715,16.43 66.894,16.609 74.399,16.609 75.035,17.245 90.898,17.245 v1(92.141,16.002) ; v1(48.26,-4.445) 52.324,-8.509 55.753,-8.509 v1(58.166,-10.922)
BOOT0: R2.1 U1.94 | length 14.1
  Top Layer w0.254: v1(53.467,3.937) 53.848,3.937 54.356,4.445 57.418,4.445 U1.94@58.664,3.2
  Bottom Layer w0.254: R2.1@45.831,3.175 46.085,2.921 47.625,2.921 48.015,3.311 52.841,3.311 v1(53.467,3.937)
BOOT1: R3.1 U1.37 | length 6.2
  Top Layer w0.254: U1.37@71.073,-5.675 69.977,-4.578 69.977,-4.191 v1(72.009,-2.159)
  Bottom Layer w0.254: v1(72.009,-2.159) 72.533,-2.159 R3.1@73.168,-1.524
CAN1_RX: P1.19 U1.81 | length 31.5
  Top Layer w0.254: v1(61.722,12.319) 61.894,12.147 61.894,9.162 U1.81@63.26,7.796
  Bottom Layer w0.254: P1.19@37.33,10.16 38.6,11.43 40.434,11.43 41.45,10.414 53.721,10.414 54.012,10.123 55.396,10.123 55.79,10.517 55.79,10.522 57.089,11.821 59.826,11.821 59.827,11.82 60.209,11.82 60.708,12.319 v1(61.722,12.319)
CAN1_TX: P1.20 U1.82 | length 27.4
  Top Layer w0.254: v1(61.214,11.176) 61.395,10.995 61.395,8.954 U1.82@62.906,7.442
  Bottom Layer w0.254: P1.20@39.493,10.537 P1.20@39.87,10.16 40.124,9.906 53.523,9.906 53.805,9.624 55.603,9.624 56.289,10.31 56.289,10.315 57.296,11.322 59.62,11.322 59.621,11.321 60.416,11.321 60.525,11.43 60.96,11.43 v1(61.214,11.176)
CHARGE_EN: R64.1 U10.8 U13.3 | length 10.1
  Top Layer w0.254: R64.1@96.266,10.43 96.282,10.414 U13.3@98.171,10.414 99.187,10.414 99.441,10.16 99.441,8.636 99.695,8.382 102.362,8.382 102.616,8.128 102.616,7.493 102.997,7.112 U10.8@103.759,7.112
CHARGE_FINISH: R66.1 U10.6 U13.1 U13.2 | length 21.8
  Top Layer w0.254: U13.2@98.171,10.922 99.94,10.922 ; U13.1@98.171,11.43 99.94,11.43 99.94,9.026 100.085,8.881 105.537,8.881 ; U10.6@103.378,4.445 105.41,4.445 105.828,4.863 105.828,5.993 105.537,6.284 105.537,9.144 106.045,9.652 106.045,11.192 ; R66.1@106.045,9.795 R66.1@106.68,10.43
DETECT_IN1: D3.2 D34.2 P2.3 U1.93 | length 109.9
  Top Layer w0.254: v1(47.498,3.81) 45.865,2.177 45.865,-3.518 46.092,-3.745 46.092,-5.47 44.868,-6.694 44.868,-11.782 47.437,-14.351 48.641,-14.351 48.641,-16.764 48.827,-16.95 D3.2@49.1,-16.95 ; D34.2@48.199,-14.859 D34.2@48.356,-14.701 ; D34.2@48.453,-14.859 D34.2@48.641,-15.047 ; D34.2@48.514,-14.793 D34.2@48.58,-14.859 ; v1(53.975,5.08) 57.49,5.08 U1.93@59.017,3.553
  Bottom Layer w0.254: v1(47.498,3.81) 52.39,3.81 53.66,5.08 v1(53.975,5.08) ; v1(48.641,-15.875) 50.038,-15.875 50.419,-16.256 55.118,-16.256 57.277,-18.415 58.603,-18.415 58.693,-18.505 58.698,-18.505 59.092,-18.899 59.092,-18.904 60.636,-20.448 101.163,-20.448 102.534,-19.077 111.739,-19.077 115.576,-15.24 P2.3@116.53,-15.24
DETECT_IN2: D4.2 D35.2 P2.4 U1.54 | length 123.3
  Top Layer w0.254: D4.2@52.959,-16.891 53.023,-16.954 v1(54.61,-16.954) 54.61,-14.666 D35.2@54.991,-14.285 ; v1(58.42,-19.177) 58.711,-18.886 58.711,-16.164 59.563,-15.312 59.563,-13.282 v1(60.87,-11.975) ; U1.54@74.609,2.139 74.609,2.14 76.279,3.81 v1(76.708,3.81) ; v1(78.613,-10.922) 80.109,-9.426 80.109,-8.029 80.762,-7.376 80.762,-3.608 81.67,-2.7 81.67,0.499 81.407,0.762 v1(81.407,2.032)
  Bottom Layer w0.254: v1@54.546,-16.954 56.769,-19.177 v1(58.42,-19.177) 60.19,-20.947 101.37,-20.947 102.741,-19.576 111.946,-19.576 115.139,-16.383 117.927,-16.383 P2.4@119.07,-15.24 ; v1(60.87,-11.975) 68.998,-11.975 70.485,-13.462 76.073,-13.462 v1(78.613,-10.922) ; v1(76.708,3.81) 76.745,3.773 78.081,3.773 79.859,1.995 81.37,1.995 v1(81.407,2.032)
DETECT_IN3: D5.2 D36.2 P2.5 U1.35 | length 86.3
  Top Layer w0.254: v1(57.912,-17.653) 57.203,-17.653 D5.2@56.5,-16.95 56.515,-16.935 56.515,-15.682 D36.2@58.293,-13.904 ; v1(68.453,-18.796) 69.379,-17.87 69.379,-16.29 69.884,-15.785 72.494,-15.785 74.268,-14.011 74.268,-10.283 U1.35@70.366,-6.382
  Bottom Layer w0.254: v1(57.912,-17.653) 58.547,-17.653 58.9,-18.006 58.905,-18.006 59.591,-18.692 59.591,-18.697 59.69,-18.796 63.693,-18.796 64.365,-18.124 67.781,-18.124 69.107,-19.45 100.75,-19.45 102.121,-18.079 111.326,-18.079 116.53,-12.875 P2.5@116.53,-12.7
DETECT_IN4: D6.2 D37.2 P2.6 U1.23 | length 81
  Top Layer w0.254: D37.2@59.121,-24.257 59.121,-24.231 60.492,-22.86 61.976,-22.86 62.23,-22.606 62.23,-21.336 62.611,-20.955 63.373,-20.955 64.615,-19.713 64.615,-18.006 64.008,-17.399 63.549,-17.399 D6.2@63.1,-16.95 62.66,-16.51 61.788,-16.51 61.177,-15.899 61.177,-15.343 61.661,-14.859 62.738,-14.859 63.373,-14.224 63.373,-9.804 U1.23@64.321,-8.857
  Bottom Layer w0.254: v1(64.643,-18.796) 65.913,-18.796 67.066,-19.949 100.956,-19.949 102.327,-18.578 111.533,-18.578 116.141,-13.97 117.8,-13.97 P2.6@119.07,-12.7
DETECT_IN5: D7.2 D38.2 P2.7 U1.26 | length 70.5
  Top Layer w0.254: D38.2@63.5,-22.418 63.561,-22.418 64.262,-21.717 64.262,-20.828 65.114,-19.976 65.114,-19.341 65.659,-18.796 65.659,-17.907 66.616,-16.95 D7.2@66.9,-16.95 ; U1.26@67.184,-9.564 67.908,-10.287 67.908,-13.019 65.659,-15.268 65.659,-15.709 D7.2@66.9,-16.95 ; v1@68.453,-17.526 68.199,-17.272 67.222,-17.272 D7.2@66.9,-16.95
  Bottom Layer w0.254: v1(68.58,-17.653) 68.797,-17.87 74.639,-17.87 75.221,-18.452 100.336,-18.452 101.707,-17.081 110.913,-17.081 114.808,-13.186 114.808,-11.867 116.515,-10.16 P2.7@116.53,-10.16
DETECT_IN6: D24.2 D39.2 P2.8 U1.36 | length 77.4
  Top Layer w0.254: D39.2@67.752,-24.257 68.676,-23.333 68.676,-20.351 69.088,-19.939 71.628,-19.939 72.39,-19.177 72.39,-17.272 ; D24.2@70.7,-16.95 71.022,-17.272 72.39,-17.272 ; U1.36@70.72,-6.028 70.72,-6.029 74.767,-10.077 74.767,-14.218 72.39,-16.595 72.39,-17.272
  Bottom Layer w0.254: v1(72.39,-18.542) 74.041,-18.542 74.45,-18.951 100.543,-18.951 101.914,-17.58 111.119,-17.58 115.314,-13.385 115.314,-12.067 115.951,-11.43 117.8,-11.43 P2.8@119.07,-10.16
DETECT_IN7: D26.2 D40.2 P2.9 U1.38 | length 73.4
  Top Layer w0.254: D40.2@70.424,-24.257 70.424,-24.003 69.175,-22.754 69.175,-20.614 69.321,-20.468 71.988,-20.468 73.279,-19.177 73.279,-17.907 74.368,-16.818 74.695,-17.145 74.93,-17.145 75.565,-17.78 v1(75.946,-17.78) ; U1.38@71.427,-5.321 75.311,-9.205 75.311,-16.347 D26.2@74.708,-16.95
  Bottom Layer w0.254: v1(75.946,-17.78) 77.851,-17.78 78.65,-16.981 80.735,-16.981 81.189,-17.435 99.942,-17.435 101.294,-16.083 110.499,-16.083 113.81,-12.772 113.81,-10.523 116.104,-8.229 P2.9@116.104,-7.818
DETECT_IN8: D27.2 D41.2 P2.10 U1.39 | length 70.1
  Top Layer w0.254: U1.39@71.781,-4.967 74.106,-7.293 74.106,-7.295 75.819,-9.007 75.819,-14.478 77.851,-16.51 D27.2@78.359,-16.51 ; D41.2@76.515,-24.257 77.566,-23.206 77.566,-20.407 78.025,-19.948 79.168,-19.948 79.883,-19.233 v1(79.883,-17.653) 79.003,-17.653 D27.2@78.3,-16.95
  Bottom Layer w0.254: v1@79.756,-17.653 80.701,-17.653 80.982,-17.934 100.148,-17.934 101.5,-16.582 110.706,-16.582 114.309,-12.979 114.309,-10.73 116.022,-9.017 117.673,-9.017 P2.10@119.07,-7.62
DETECT_IN9: D28.2 D42.2 P2.11 U1.40 | length 71.5
  Top Layer w0.254: U1.40@72.134,-4.614 72.136,-4.614 72.281,-4.759 74.679,-7.157 74.679,-7.16 76.318,-8.799 76.318,-14.088 78.096,-15.866 81.016,-15.866 D28.2@82.041,-16.891 ; D42.2@79.568,-24.257 78.065,-22.754 78.065,-20.614 78.232,-20.447 79.375,-20.447 80.391,-19.431 80.391,-18.541 D28.2@82.041,-16.891 ; v1(83.312,-16.637) 82.413,-16.637 D28.2@82.1,-16.95 D28.2@82.041,-16.891
  Bottom Layer w0.254: v1(83.312,-16.637) 83.566,-16.891 85.725,-16.891 86.651,-15.965 88.101,-15.965 88.519,-16.383 99.582,-16.383 100.88,-15.085 110.086,-15.085 112.812,-12.359 112.812,-7.081 113.924,-5.969 114.554,-5.969 115.443,-5.08 P2.11@116.53,-5.08
DETECT_IN10: D29.2 D43.2 P2.12 U1.41 | length 71.6
  Top Layer w0.254: U1.41@72.488,-4.26 72.489,-4.26 76.817,-8.588 76.817,-13.881 78.303,-15.367 86.473,-15.367 87.185,-16.08 v1(87.185,-16.637) ; D43.2@85.405,-23.814 86.456,-22.763 86.456,-20.351 87.185,-19.621 v1(87.185,-16.637) ; D29.2@85.9,-16.95 86.213,-16.637 v1(87.185,-16.637)
  Bottom Layer w0.254: v1(87.185,-16.637) 88.011,-16.637 88.302,-16.928 99.743,-16.928 101.087,-15.584 110.292,-15.584 113.311,-12.565 113.311,-10.133 115.062,-8.382 115.062,-7.239 115.951,-6.35 117.8,-6.35 P2.12@119.07,-5.08
DETECT_IN11: D30.2 D44.2 P2.13 U1.42 | length 72.8
  Top Layer w0.254: U1.42@72.841,-3.907 77.316,-8.382 77.316,-13.675 78.509,-14.868 86.679,-14.868 87.496,-15.684 v1(89.852,-15.684) 89.852,-16.875 89.551,-16.875 88.265,-18.161 88.265,-19.376 86.955,-20.686 86.955,-22.82 87.95,-23.815 D44.2@87.95,-24.257
  Bottom Layer w0.254: v1(89.852,-15.684) 92.204,-15.684 92.959,-14.93 99.624,-14.93 100.467,-14.087 109.672,-14.087 111.814,-11.945 111.814,-6.667 112.649,-5.832 112.649,-2.752 113.369,-2.032 116.022,-2.032 P2.13@116.53,-2.54
DETECT_IN12: D31.2 D45.2 P2.14 U1.43 | length 73.6
  Top Layer w0.254: U1.43@73.195,-3.553 77.815,-8.173 77.815,-13.468 78.716,-14.369 86.886,-14.369 87.503,-14.986 90.297,-14.986 90.932,-15.621 v1(93.218,-15.621) 93.218,-16.668 D31.2@93.5,-16.95 ; D45.2@92.903,-24.257 92.837,-24.257 91.598,-23.018 91.598,-18.542 D31.2@93.345,-16.795
  Bottom Layer w0.254: v1(93.218,-15.621) 99.639,-15.621 100.674,-14.586 109.879,-14.586 112.313,-12.152 112.313,-6.874 113.148,-6.039 113.148,-4.581 113.771,-3.958 117.652,-3.958 P2.14@119.07,-2.54
DP_TIM_CAP_IN: D1.2 D32.2 P2.2 U1.47 | length 172.8
  Top Layer w0.254: D32.2@24.765,-16.703 24.765,-16.51 25.781,-15.494 28.644,-15.494 30.422,-17.272 32.258,-17.272 32.512,-17.526 v1(32.512,-20.32) ; U1.47@74.609,-2.139 76.788,-4.318 78.74,-4.318 79.121,-4.699 v1(79.121,-7.366) ; v1(111.887,-5.461) 113.396,-3.952 117.363,-3.952 117.8,-4.389 117.8,-16.51 P2.2@119.07,-17.78
  Bottom Layer w0.254: v1(32.512,-20.32) 34.798,-20.32 37.883,-23.405 45.373,-23.405 46.609,-22.169 46.609,-20.391 49.728,-17.272 53.213,-17.272 57.886,-21.945 101.783,-21.945 103.154,-20.574 112.359,-20.574 113.629,-19.304 117.546,-19.304 P2.2@119.07,-17.78 ; v1(79.121,-7.366) 80.645,-7.366 80.899,-7.112 84.963,-7.112 85.217,-7.366 92.583,-7.366 98.171,-1.778 108.204,-1.778 v1(111.887,-5.461)
ETH_PHY_MDIO: P1.8 U1.25 | length 37.1
  Top Layer w0.254: P1.8@39.87,-5.08 P1.8@39.892,-5.08 ; v1(64.389,-15.367) 64.389,-10.201 U1.25@64.981,-9.609 ; U1.25@64.601,-9.991 U1.25@65.028,-9.564
  Bottom Layer w0.254: P1.8@39.87,-5.08 43.925,-9.135 47.799,-9.135 48.396,-9.732 48.396,-11.293 50.645,-13.542 50.645,-13.566 51.331,-14.252 52.301,-14.252 52.32,-14.233 58.866,-14.233 60.926,-16.293 62.2,-16.293 62.872,-15.621 64.135,-15.621 v1(64.389,-15.367)
ETH_PHY_RST: P1.11 U1.15 | length 30.7
  Top Layer w0.254: v1(56.007,-10.287) 57.903,-8.391 59.124,-8.391 60.883,-6.631 60.885,-6.631 61.103,-6.413 61.107,-6.413 U1.15@61.492,-6.028
  Bottom Layer w0.254: P1.11@37.33,0 38.6,-1.27 40.386,-1.27 41.275,-2.159 41.275,-2.794 45.348,-6.867 48.904,-6.867 52.541,-10.504 55.79,-10.504 v1(56.007,-10.287)
ETH_REF_CLK: P1.9 U1.24 | length 39.5
  Top Layer w0.254: v1(61.849,-15.621) 62.682,-15.621 63.881,-14.422 63.881,-10.002 64.673,-9.21 U1.24@64.674,-9.21
  Bottom Layer w0.254: P1.9@37.33,-2.54 38.6,-3.81 40.259,-3.81 42.545,-6.096 42.545,-6.985 44.196,-8.636 48.006,-8.636 48.895,-9.525 48.895,-11.086 51.144,-13.335 51.144,-13.359 51.538,-13.753 52.094,-13.753 52.113,-13.734 59.073,-13.734 60.96,-15.621 v1(61.849,-15.621)
ETH_RMII_CRS_DV: P1.7 U1.32 | length 50
  Top Layer w0.254: v1(66.548,-15.367) 67.691,-14.224 71.882,-14.224 72.771,-13.335 72.771,-10.909 69.306,-7.444 U1.32@69.306,-7.442
  Bottom Layer w0.254: P1.7@37.33,-5.08 38.6,-6.35 40.273,-6.35 43.557,-9.634 47.593,-9.634 47.897,-9.938 47.897,-11.499 50.146,-13.748 50.146,-13.773 51.124,-14.751 51.149,-14.751 51.157,-14.759 58.687,-14.759 60.72,-16.792 62.456,-16.792 63.128,-16.12 65.795,-16.12 v1(66.548,-15.367)
ETH_RMII_MDC: P1.10 U1.16 | length 28
  Top Layer w0.254: v1@57.015,-10.914 57.658,-10.272 57.658,-9.525 58.292,-8.891 59.329,-8.891 60.99,-7.231 60.991,-7.231 61.237,-6.985 61.238,-6.985 61.311,-6.912 61.317,-6.912 U1.16@61.846,-6.382 U1.16@61.846,-6.382
  Bottom Layer w0.254: P1.10@39.87,-2.54 43.172,-5.842 43.561,-5.842 45.085,-7.366 48.697,-7.366 52.516,-11.185 56.76,-11.185 v1(57.023,-10.922)
ETH_RMII_RXD0: P1.6 U1.33 | length 47
  Top Layer w0.254: v1(67.818,-15.367) 68.462,-14.723 72.145,-14.723 73.27,-13.598 73.27,-10.7 U1.33@69.659,-7.089
  Bottom Layer w0.254: P1.6@39.87,-7.62 40.838,-7.62 43.514,-10.296 45.165,-10.296 46.68,-11.811 47.503,-11.811 49.647,-13.955 49.647,-13.979 50.918,-15.25 50.942,-15.25 50.95,-15.258 58.48,-15.258 60.513,-17.291 62.846,-17.291 63.518,-16.619 66.566,-16.619 v1(67.818,-15.367)
ETH_RMII_RXD1: P1.5 U1.34 | length 50.9
  Top Layer w0.254: v1(68.453,-16.256) 69.487,-15.222 72.352,-15.222 73.769,-13.805 73.769,-10.493 U1.34@70.013,-6.735 U1.34@70.013,-6.735
  Bottom Layer w0.254: P1.5@37.33,-7.62 38.473,-8.763 41.275,-8.763 43.307,-10.795 44.831,-10.795 46.346,-12.31 47.296,-12.31 49.148,-14.162 49.148,-14.186 50.711,-15.749 50.735,-15.749 50.743,-15.757 58.273,-15.757 60.306,-17.79 63.287,-17.79 63.959,-17.118 67.224,-17.118 68.086,-16.256 v1(68.453,-16.256)
ETH_RMII_TX_EN: P1.14 U1.48 | length 54.8
  Top Layer w0.254: U1.48@74.963,-1.785 76.987,-3.81 78.613,-3.81 79.248,-3.175 79.248,0.508 80.2,1.46 v1(80.2,2.667)
  Bottom Layer w0.254: P1.14@39.87,2.54 41.812,4.482 47.776,4.482 47.777,4.481 52.355,4.481 53.634,5.76 57.449,5.76 57.695,6.006 75.655,6.006 77.389,4.272 78.532,4.272 80.137,2.667 v1(80.2,2.667)
ETH_RMII_TXD0: P1.16 U1.51 | length 47.2
  Top Layer w0.254: U1.51@75.461,0.866 75.461,0.872 75.521,0.933 75.527,0.933 76.381,1.787 78.241,1.787 78.867,2.413 v1(78.867,4.953)
  Bottom Layer w0.254: P1.16@39.87,5.08 40.894,5.08 41.294,5.48 48.19,5.48 48.191,5.479 51.942,5.479 53.221,6.758 57.036,6.758 57.282,7.004 76.816,7.004 v1(78.867,4.953)
ETH_RMII_TXD1: P1.13 U1.52 | length 50.1
  Top Layer w0.254: 74.712,0.829 74.962,1.079 74.962,1.082 75.114,1.234 75.117,1.234 76.169,2.286 78.034,2.286 78.359,2.611 78.359,4.318 v1(77.724,4.953) ; U1.52@75.316,1.432 75.625,1.741 U1.52@75.629,1.741
  Bottom Layer w0.254: P1.13@37.33,2.54 38.6,3.81 40.386,3.81 41.557,4.981 47.983,4.981 47.984,4.98 52.148,4.98 53.427,6.259 57.242,6.259 57.488,6.505 76.172,6.505 v1(77.724,4.953)